# EAGLE board Initial (EAGLE 6.5.0)

Size 100 x 80 mm. Coordinates in mm from the lower left corner, seen from the top.
Outline: 0,0 100,0 100,80 0,80 0,0
Copper layers (1*16): Top 0.035mm / dielectric 1.5mm / Bottom 0.035mm
Design rules "default": minimum track width 10mil, minimum drill 24mil, track to track 8mil, track to pad 8mil, pad to pad 8mil, via to via 8mil, smd to smd 8mil, copper to edge 40mil, drill to drill 8mil, minimum pad ring 10mil, minimum via ring 8mil, stop-mask expansion 4mil, vias tented up to drill 0mil, thermal gap 10mil

## Footprints (pad centres in the part's own frame; a part is rotated, then mirrored left to right if it is on the bottom)
SOIC127P600X175-16N = smd 1.981 x 0.559: 1 -2.362,4.445; 2 -2.362,3.175; 3 -2.362,1.905; 4 -2.362,0.635; 5 -2.362,-0.635; 6 -2.362,-1.905; 7 -2.362,-3.175; 8 -2.362,-4.445; 9 2.362,-4.445; 10 2.362,-3.175; 11 2.362,-1.905; 12 2.362,-0.635; 13 2.362,0.635; 14 2.362,1.905; 15 2.362,3.175; 16 2.362,4.445
CAPC1005X60N = smd 0.457 x 0.61: 1 -0.483,0; 2 0.483,0
CAPC3225X170N = smd 1.118 x 2.692: 1 -1.499,0; 2 1.499,0
LSP10 = drill 1.016 pad 2.159 octagon: MP 0,0
SOIC127P798X216-8N = smd 1.549 x 0.559: 1 -3.708,1.905; 2 -3.708,0.635; 3 -3.708,-0.635; 4 -3.708,-1.905; 5 3.708,-1.905; 6 3.708,-0.635; 7 3.708,0.635; 8 3.708,1.905
CSR1010A05-IQQM-R = smd 0.186 x 0.4: AIO[0] -0.2,-0.9; AIO[1] -0.7,-0.9; AIO[2] -1.2,-0.9; I2C_SCL -0.2,3.7; I2C_SDA -0.7,3.7; PIO[0]/UART_TX 0.3,-0.9; PIO[1]/UART_RX 0.8,-0.9; PIO[2] 0.3,3.7; SMPS_LX -1.7,3.7; SPI_PIO# 0.8,3.7; VDD_CORE@1 -1.2,3.7; XTAL_16M_IN -1.7,-0.9 | smd 0.2 x 0.4: PIO[3]/SF_DIN 1.3,-0.9; PIO[11] 1.3,3.7; VDD_BAT_SMPS -2.2,3.7; XTAL_16M_OUT -2.2,-0.9 | smd 0.4 x 0.2: PIO[4]/SF_CS# 1.85,-0.35; PIO[10] 1.85,3.15; VDD_BAT -2.75,3.15; VDD_XTAL -2.75,-0.35 | smd 0.4 x 0.186: PIO[5]/DEBUG_CLK 1.85,0.15; PIO[6]/DEBUG_CS# 1.85,0.65; PIO[7]/DEBUG_MOSI 1.85,1.15; PIO[8]/DEBUG_MISO 1.85,2.15; PIO[9] 1.85,2.65; RF -2.75,0.15; VDD_CORE -2.75,1.15; VDD_PADS 1.85,1.65; VDD_REG_IN -2.75,0.65; WAKE -2.75,1.65; XTAL_32K_IN -2.75,2.15; XTAL_32K_OUT -2.75,2.65

## Placement (x,y rotation side)
ADC0  MCP3008-I/SL  [SOIC127P600X175-16N]  -29.21,8.89 0 top  (outside the outline)
ADC1  MCP3008-I/SL  [SOIC127P600X175-16N]  -52.07,8.89 0 top  (outside the outline)
C1  47u  [CAPC1005X60N]  -39.37,52.07 0 top  (outside the outline)
C2  4.7uH  [CAPC1005X60N]  -19.05,34.29 0 top  (outside the outline)
C3  15pF  [CAPC1005X60N]  -48.26,34.29 0 top  (outside the outline)
C4  8.2pF  [CAPC1005X60N]  -29.21,34.29 0 top  (outside the outline)
C5  10pF  [CAPC1005X60N]  -57.15,34.29 0 top  (outside the outline)
C6  10pF  [CAPC1005X60N]  -17.78,43.18 0 top  (outside the outline)
C7  0.5pF  [CAPC1005X60N]  -39.37,34.29 0 top  (outside the outline)
C8  4.7uH  [CAPC3225X170N]  -45.72,22.86 0 top  (outside the outline)
C9  33p  [CAPC1005X60N]  -46.99,52.07 0 top  (outside the outline)
C10  4u7  [CAPC1005X60N]  -60.96,43.18 0 top  (outside the outline)
C11  470n  [CAPC1005X60N]  -26.67,43.18 0 top  (outside the outline)
C12  470n  [CAPC1005X60N]  -35.56,43.18 0 top  (outside the outline)
C13  150n  [CAPC1005X60N]  -44.45,43.18 0 top  (outside the outline)
C14  470n  [CAPC1005X60N]  -53.34,43.18 0 top  (outside the outline)
C15  47n  [CAPC1005X60N]  -16.51,52.07 0 top  (outside the outline)
C16  47n  [CAPC1005X60N]  -24.13,52.07 0 top  (outside the outline)
C17  4u7  [CAPC1005X60N]  -31.75,52.07 0 top  (outside the outline)
CH0  LSP10  [LSP10]  -41.91,58.42 0 top  (outside the outline)
CH1  LSP10  [LSP10]  -46.99,58.42 0 top  (outside the outline)
CH2  LSP10  [LSP10]  -52.07,58.42 0 top  (outside the outline)
CH3  LSP10  [LSP10]  -57.15,58.42 0 top  (outside the outline)
CH4  LSP10  [LSP10]  -62.23,58.42 0 top  (outside the outline)
CH5  LSP10  [LSP10]  -16.51,63.5 0 top  (outside the outline)
CH6  LSP10  [LSP10]  -21.59,63.5 0 top  (outside the outline)
CH7  LSP10  [LSP10]  -26.67,63.5 0 top  (outside the outline)
CH8  LSP10  [LSP10]  -31.75,63.5 0 top  (outside the outline)
CH9  LSP10  [LSP10]  -36.83,63.5 0 top  (outside the outline)
CH10  LSP10  [LSP10]  -55.88,49.53 0 top  (outside the outline)
CH11  LSP10  [LSP10]  -36.83,58.42 0 top  (outside the outline)
CH12  LSP10  [LSP10]  -62.23,49.53 0 top  (outside the outline)
CH13  LSP10  [LSP10]  -17.78,58.42 0 top  (outside the outline)
CH14  LSP10  [LSP10]  -24.13,58.42 0 top  (outside the outline)
CH15  LSP10  [LSP10]  -30.48,58.42 0 top  (outside the outline)
U2  AT24C512C-SHD-B  [SOIC127P798X216-8N]  -35.56,24.13 0 top  (outside the outline)
U$1  CSR1010A05-IQQM-R  [CSR1010A05-IQQM-R]  -54.61,21.59 0 top  (outside the outline)

## Library data of the parts
ADC0 ADC1 = Microchip_By_element14_Batch_1; MPN: MCP3008-I/SL; OC_FARNELL: 1292241; OC_NEWARK: 19C7201; PACKAGE: SOIC16; SUPPLIER: Microchip
C1 C2 C5 C6 C9-C14 = AVX_By_element14_Batch_1; MPN: UQCL2A100JAT2A/500; OC_FARNELL: -; OC_NEWARK: 32T8791; SUPPLIER: AVX; TOLERANCE: ±5%; VOLTAGERATING: 200V
C3 = AVX_By_element14_Batch_1; MPN: UQCL2A150JAT2A/500; OC_FARNELL: -; OC_NEWARK: 32T8795; SUPPLIER: AVX; TOLERANCE: ±5%; VOLTAGERATING: 200V
C4 = AVX_By_element14_Batch_1; MPN: UQCL2A8R2CAT2A/500; OC_FARNELL: -; OC_NEWARK: 32T8828; SUPPLIER: AVX; TOLERANCE: ±.25 pF; VOLTAGERATING: 200V
C7 = AVX_By_element14_Batch_1; MPN: UQCL2A0R5BAT2A/500; OC_FARNELL: -; OC_NEWARK: 32T8767; SUPPLIER: AVX; TOLERANCE: ±.1 pF; VOLTAGERATING: 200V
C8 = AVX_By_element14_Batch_1; MPN: 1210AC103KAZ1A; OC_FARNELL: 1604908; OC_NEWARK: 54M5358; SUPPLIER: AVX; TOLERANCE: ±10%; VOLTAGERATING: 1000V (1kV)
C15-C17 = AVX_By_element14_Batch_1; MPN: UQCL2A1R0BAT2A/500; OC_FARNELL: -; OC_NEWARK: 32T8778; SUPPLIER: AVX; TOLERANCE: ±.1 pF; VOLTAGERATING: 200V
CH0 CH1-CH15 = solpad
U2 = ATMEL-AT24C512C-SHD-B; MPN: AT24C512C-SHD-B; OC_FARNELL: 1972003; OC_NEWARK: 68T4124; PACKAGE: 8SOIC-Wide; SUPPLIER: ATMEL
U$1 = CSR1010A05

## Nets
GND: ADC0.9 ADC0.14 ADC1.9 ADC1.14 C1.2 C3.2 C4.2 C5.1 C6.1 C7.1 C7.2 C9.2 C10.2 C11.2 C12.1 C13.1 C14.2 C15.1 C16.1 C17.1 U2.1 U2.2 U2.3 U2.4 U2.7 U$1.RF U$1.WAKE
N$1: ADC0.8 CH7.MP
N$2: ADC0.7 CH6.MP
N$3: ADC0.6 CH5.MP
N$4: ADC0.5 CH4.MP
N$5: ADC0.4 CH3.MP
N$6: ADC0.3 CH2.MP
N$7: ADC0.2 CH1.MP
N$8: ADC0.1 CH0.MP
N$9: ADC1.8 CH15.MP
N$10: ADC1.7 CH14.MP
N$11: ADC1.6 CH13.MP
N$12: ADC1.5 CH12.MP
N$13: ADC1.4 CH11.MP
N$14: ADC1.3 CH10.MP
N$15: ADC1.2 CH9.MP
N$16: ADC1.1 CH8.MP
N$17: U2.5 U$1.I2C_SDA
N$18: U2.6 U$1.I2C_SCL
N$19: C8.1 U$1.SMPS_LX
N$21: ADC0.13 ADC1.13 U$1.PIO[5]/DEBUG_CLK
N$22: ADC0.12 ADC1.12 U$1.PIO[8]/DEBUG_MISO
N$23: ADC0.11 ADC1.11 U$1.PIO[7]/DEBUG_MOSI
N$24: ADC1.10 U$1.PIO[9]
N$25: ADC0.10 U$1.PIO[4]/SF_CS#
N$26: C5.2 U$1.XTAL_32K_OUT
N$27: C6.2 U$1.XTAL_32K_IN
N$28: C12.2 C13.2 U$1.VDD_CORE U$1.VDD_CORE@1
N$29: C3.1 U$1.XTAL_16M_OUT
N$30: U$1.XTAL_16M_IN
N$32: C2.2 C9.1 U$1.VDD_BAT
N$33: C8.2 C10.1 C11.1 U$1.VDD_REG_IN
N$34: C1.1 C2.1 C15.2 C16.2 C17.2 U$1.VDD_BAT_SMPS U$1.VDD_PADS
N$35: C14.1 U$1.VDD_XTAL
VDD: ADC0.15 ADC0.16 ADC1.15 ADC1.16 U2.8

## Tracks (layer width: path | path; a pad name or v marks a point on that pad's centre or on a via)
GND  (26 unrouted)
N$1  (1 unrouted)
N$2  (1 unrouted)
N$3  (1 unrouted)
N$4  (1 unrouted)
N$5  (1 unrouted)
N$6  (1 unrouted)
N$7  (1 unrouted)
N$8  (1 unrouted)
N$9  (1 unrouted)
N$10  (1 unrouted)
N$11  (1 unrouted)
N$12  (1 unrouted)
N$13  (1 unrouted)
N$14  (1 unrouted)
N$15  (1 unrouted)
N$16  (1 unrouted)
N$17  (1 unrouted)
N$18  (1 unrouted)
N$19  (1 unrouted)
N$21  (2 unrouted)
N$22  (2 unrouted)
N$23  (2 unrouted)
N$24  (1 unrouted)
N$25  (1 unrouted)
N$26  (1 unrouted)
N$27  (1 unrouted)
N$28  (3 unrouted)
N$29  (1 unrouted)
N$32  (2 unrouted)
N$33  (3 unrouted)
N$34  (6 unrouted)
N$35  (1 unrouted)
VDD  (4 unrouted)